# EAGLE board Sturingsschakeling_PCB_v4.0 (EAGLE 9.7.0)
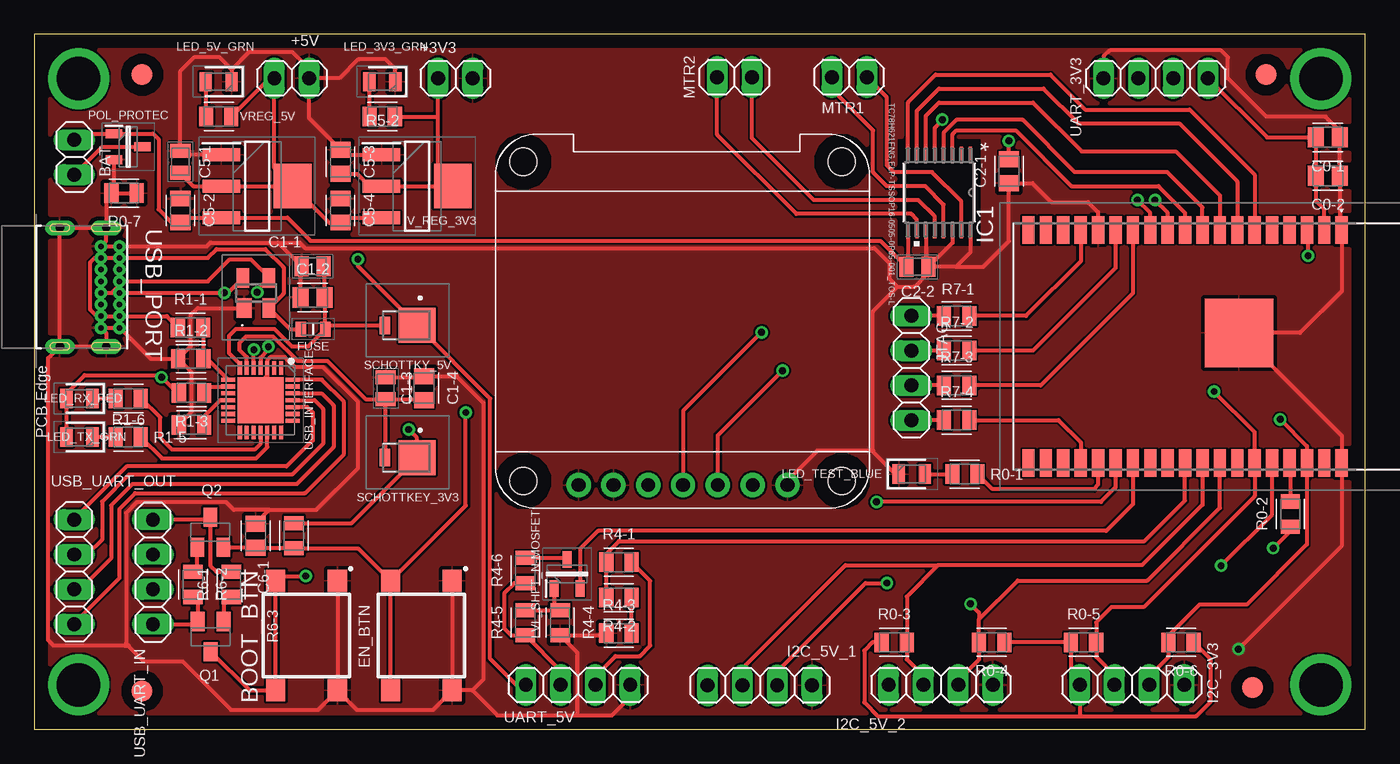
[diagram p0: board, top side]
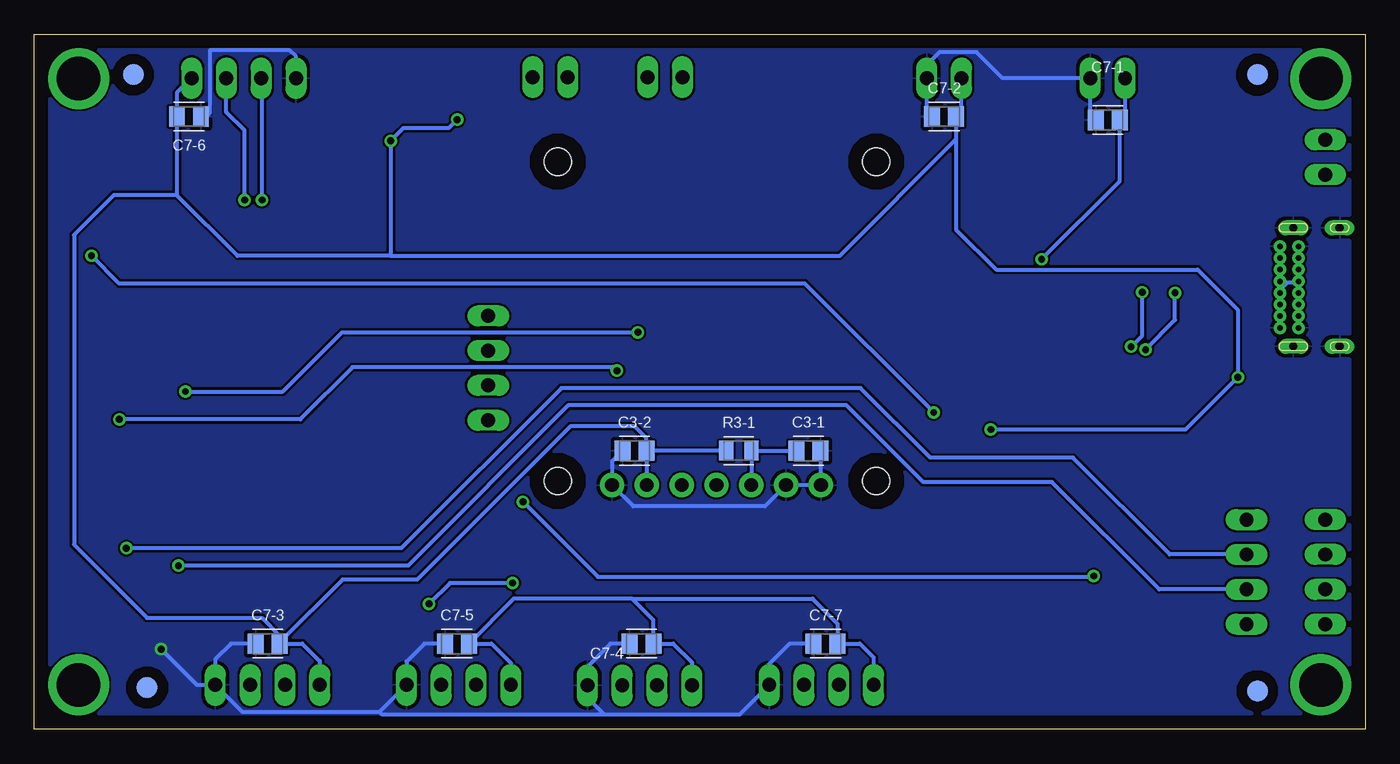
[diagram p1: board, bottom side, seen from below]

Size 97.14 x 50.7 mm. Coordinates in mm from the lower left corner, seen from the top.
Outline: 0,0 97.14,0 97.14,50.7 0,50.7 0,0
Copper layers (1*16): Top 0.035mm / dielectric 1.5mm / Bottom 0.035mm
Design rules "default": minimum track width 6mil, minimum drill 0.35mm, track to track 6mil, track to pad 6mil, pad to pad 6mil, via to via 6mil, smd to smd 6mil, copper to edge 40mil, drill to drill 6mil, minimum pad ring 10mil, minimum via ring 8mil, stop-mask expansion 4mil, vias tented up to drill 0mil, thermal gap 10mil

## Footprints (pad centres in the part's own frame; a part is rotated, then mirrored left to right if it is on the bottom)
1X02 = drill 1.016 long: 1 -1.27,0; 2 1.27,0
B3FS-1000P = smd 1.6 x 1.4: 1 4,-2.25; 2 -4,-2.25; 3 4,2.25; 4 -4,2.25
CAPC2012X110 = smd 1.165 x 1.465: 1 -0.875,0; 2 0.875,0
CAPC2012X145N = smd 1.02 x 1.47: 1 -0.8,0; 2 0.8,0
FID_060_P = smd 1.524 x 1.524 bottom: FIDB 0,0 | smd 1.524 x 1.524: FIDT 0,0
FUSC1608X100N = smd 0.77 x 1.07: 1 -0.9,0; 2 0.9,0
1X04 = drill 1.016 long: 1 -3.81,0; 2 -1.27,0; 3 1.27,0; 4 3.81,0
ESP32WROVER = smd 2 x 0.9: 1 -8.5,8.26; 2 -8.5,6.99; 3 -8.5,5.72; 4 -8.5,4.45; 5 -8.5,3.18; 6 -8.5,1.91; 7 -8.5,0.64; 8 -8.5,-0.63; 9 -8.5,-1.9; 10 -8.5,-3.17; 11 -8.5,-4.44; 12 -8.5,-5.71; 13 -8.5,-6.98; 14 -8.5,-8.25; 15 -8.5,-9.52; 16 -8.5,-10.79; 17 -8.5,-12.06; 18 -8.5,-13.33; 19 -8.5,-14.6; 20 8.5,-14.6; 21 8.5,-13.33; 22 8.5,-12.06; 23 8.5,-10.79; 24 8.5,-9.52; 25 8.5,-8.25; 26 8.5,-6.98; 27 8.5,-5.71; 28 8.5,-4.44; 29 8.5,-3.17; 30 8.5,-1.9; 31 8.5,-0.63; 32 8.5,0.64; 33 8.5,1.91; 34 8.5,3.18; 35 8.5,4.45; 36 8.5,5.72; 37 8.5,6.99; 38 8.5,8.26 | smd 5 x 5: 39 -1,0.76
LEDC2012X80N = smd 0.9 x 1.4: 1 -0.95,0; 2 0.95,0
SOT96P240X110-3N = smd 1.2 x 0.65: 1 -1.05,0.96; 2 -1.05,-0.96; 3 1.05,0
BEAGLEBONEBLACK_MOUNTING_HOLE = drill 3.175 pad 4.445: P$1 0,0
P-TSSOP16-0505-0P65-001_TOS-L = smd 1.006 x 0.23: 1 -2.849,2.275; 2 -2.849,1.625; 3 -2.849,0.975; 4 -2.849,0.325; 5 -2.849,-0.325; 6 -2.849,-0.975; 7 -2.849,-1.625; 8 -2.849,-2.275; 9 2.849,-2.275; 10 2.849,-1.625; 11 2.849,-0.975; 12 2.849,-0.325; 13 2.849,0.325; 14 2.849,0.975; 15 2.849,1.625; 16 2.849,2.275
OLED096_SPI/I2C = drill 1 pad 1.778: CS/GND 22.5,26.87; D0/SCL 12.34,26.87; D1/SDA 14.88,26.87; DC/GND 19.96,26.87; GND 7.26,26.87; RES/RST 17.42,26.87; VCC 9.8,26.87 | hole 2: 3.3,3.27; 26.54,3.27; 26.54,26.57; 3.3,26.57
SOT23-BEC = smd 1 x 1.4: B -0.95,-1.1; C 0,1.1; E 0.95,-1.1
RESC2012X65 = smd 1.031 x 1.42: 1 -0.919,0; 2 0.919,0
SS1P3LM384A = smd 2.67 x 2.54: 1 0,0 | smd 0.762 x 1.27: 2 2.351,0
SP0503BAHTG = smd 1.1 x 1.4: 1 -0.85,-1.1 | smd 0.9 x 1.4: 2 0.95,-1.1; 3 0.95,1.1; 4 -0.95,1.1
QFN50P500X500X80-29N = smd 1 x 0.3: 1 -2.35,1.5; 2 -2.35,1; 3 -2.35,0.5; 4 -2.35,0; 5 -2.35,-0.5; 6 -2.35,-1; 7 -2.35,-1.5; 15 2.35,-1.5; 16 2.35,-1; 17 2.35,-0.5; 18 2.35,0; 19 2.35,0.5; 20 2.35,1; 21 2.35,1.5 | smd 0.3 x 1: 8 -1.5,-2.35; 9 -1,-2.35; 10 -0.5,-2.35; 11 0,-2.35; 12 0.5,-2.35; 13 1,-2.35; 14 1.5,-2.35; 22 1.5,2.35; 23 1,2.35; 24 0.5,2.35; 25 0,2.35; 26 -0.5,2.35; 27 -1,2.35; 28 -1.5,2.35 | smd 3.35 x 3.35: 29 0,0
GCT_USB4085-GF-A_REVA4 = drill 0.4 pad 0.65: A1 -2.975,4.025; A4 -2.125,4.025; A5 -1.275,4.025; A6 -0.425,4.025; A7 0.425,4.025; A8 1.275,4.025; A9 2.125,4.025; A12 2.975,4.025; B1 2.975,2.675; B4 2.125,2.675; B5 1.275,2.675; B6 0.425,2.675; B7 -0.425,2.675; B8 -1.275,2.675; B9 -2.125,2.675; B12 -2.975,2.675 | drill 0.6 pad 1.108 long: P1 -4.325,3.045; P2 4.325,3.045; P3 4.325,-0.335; P4 -4.325,-0.335
SOT230P700X180-4N = smd 2.75 x 0.95: 1 -2.6,2.3; 2 -2.6,0; 3 -2.6,-2.3 | smd 2.75 x 3.25: 4 2.6,0

## Placement (x,y rotation side)
+3V3  PINHD-1X2  [1X02]  30.73,47.5 0 top
+5V  PINHD-1X2  [1X02]  18.8,47.5 0 top
BAT  PINHD-1X2  [1X02]  2.92,41.73 270 top
BOOT_BTN  B3FS-1000P  [B3FS-1000P]  19.87,6.83 90 top
C0-1  22uF  [CAPC2012X110]  94.41,43.18 180 top
C0-2  100nF  [CAPC2012X110]  94.41,40.39 180 top
C1-1  4.7uF_16V  [CAPC2012X145N]  20.32,33.78 0 top
C1-2  100nF  [CAPC2012X110]  20.32,31.5 0 top
C1-3  4.7uF_16V  [CAPC2012X145N]  25.65,24.89 270 top
C1-4  100nF  [CAPC2012X110]  28.45,24.89 270 top
C2-1  1uF  [CAPC2012X110]  71.15,40.72 90 top
C2-2  4.7uF_16V  [CAPC2012X145N]  64.47,33.73 180 top
C3-1  100nF  [CAPC2012X110]  40.64,20.32 0 bottom
C3-2  100nF  [CAPC2012X110]  53.34,20.32 0 bottom
C5-1  4.7uF_16V  [CAPC2012X145N]  10.67,41.4 270 top
C5-2  1uF  [CAPC2012X110]  10.67,37.85 270 top
C5-3  4.7uF  [CAPC2012X110]  22.35,41.4 270 top
C5-4  1uF  [CAPC2012X110]  22.35,37.85 270 top
C6-1  1uF  [CAPC2012X110]  16.15,14.12 270 top
C7-1  1uF  [CAPC2012X110]  18.8,44.45 0 bottom
C7-2  1uF  [CAPC2012X110]  30.73,44.7 0 bottom
C7-3  1uF  [CAPC2012X110]  80.09,6.25 0 bottom
C7-4  1uF  [CAPC2012X110]  52.83,6.25 0 bottom
C7-5  1uF  [CAPC2012X110]  66.29,6.25 0 bottom
C7-6  1uF  [CAPC2012X110]  85.85,44.7 180 bottom
C7-7  1uF  [CAPC2012X110]  39.38,6.25 0 bottom
EN_BTN  B3FS-1000P  [B3FS-1000P]  28.26,6.83 90 top
FD1  FID_60MIL_P  [FID_060_P]  7.87,47.75 0 top
FD2  FID_60MIL_P  [FID_060_P]  89.92,47.75 0 top
FD3  FID_60MIL_P  [FID_060_P]  88.9,3.05 0 top
FD4  FID_60MIL_P  [FID_060_P]  7.87,2.79 0 top
FUSE  MF-FSMF050X-2  [FUSC1608X100N]  20.35,29.18 180 top
I2C_3V3  PINHD-1X4  [1X04]  80.11,3.23 0 top
I2C_5V_1  PINHD-1X4  [1X04]  52.96,3.2 0 top
I2C_5V_2  PINHD-1X4  [1X04]  66.17,3.23 0 top
IC1  ESP32-WROVER  [ESP32WROVER]  87.16,27.92 270 top
JTAG  PINHD-1X4  [1X04]  64.01,26.35 270 top
LED_3V3_GRN  150080RS75000  [LEDC2012X80N]  25.4,47.24 180 top
LED_5V_GRN  150080RS75000  [LEDC2012X80N]  13.46,47.24 180 top
LED_RX_RED  150080RS75000  [LEDC2012X80N]  3.3,24.13 180 top
LED_TEST_BLUE  150080RS75000  [LEDC2012X80N]  64.05,18.62 0 top
LED_TX_GRN  150080RS75000  [LEDC2012X80N]  3.3,21.32 180 top
LVL_SHFT_N-MOSFET  DMG3414U  [SOT96P240X110-3N]  38.89,11.33 90 top
MGT1  BEAGLEBONEBLACK_MOUNTING_HOLE  [BEAGLEBONEBLACK_MOUNTING_HOLE]  3.24,47.47 0 top
MGT2  BEAGLEBONEBLACK_MOUNTING_HOLE  [BEAGLEBONEBLACK_MOUNTING_HOLE]  93.9,3.24 0 top
MGT3  BEAGLEBONEBLACK_MOUNTING_HOLE  [BEAGLEBONEBLACK_MOUNTING_HOLE]  3.24,3.24 0 top
MGT4  BEAGLEBONEBLACK_MOUNTING_HOLE  [BEAGLEBONEBLACK_MOUNTING_HOLE]  93.9,47.47 0 top
MTR1  PINHD-1X2  [1X02]  59.49,47.58 180 top
MTR2  PINHD-1X2  [1X02]  51.1,47.58 180 top
MTR_DRVR  TC78H621FNG,ELP-TSSOP16-0505-0P65-001_TOS-L  [P-TSSOP16-0505-0P65-001_TOS-L]  66.04,39.16 270 top
OLED  OLED096_SPI/I2C  [OLED096_SPI/I2C]  62.23,44.68 180 top
POL_PROTEC  DMG3414U  [SOT96P240X110-3N]  6.86,42.49 0 top
Q1  BC817-16SMD  [SOT23-BEC]  12.88,6.76 180 top
Q2  BC817-16SMD  [SOT23-BEC]  12.85,14.38 0 top
R0-1  1kΩ  [RESC2012X65]  67.92,18.62 0 top
R0-2  499Ω  [RESC2012X65]  91.67,15.7 90 top
R0-3  4k7Ω  [RESC2012X65]  62.76,6.34 0 top
R0-4  4k7Ω  [RESC2012X65]  69.88,6.34 180 top
R0-5  2k4Ω  [RESC2012X65]  76.58,6.34 0 top
R0-6  2k4Ω  [RESC2012X65]  83.69,6.34 180 top
R0-7  1kΩ  [RESC2012X65]  6.55,39.12 180 top
R1-1  22k1Ω  [RESC2012X65]  11.4,29.32 0 top
R1-2  47k5Ω  [RESC2012X65]  11.43,27.03 0 top
R1-3  1kΩ  [RESC2012X65]  11.48,24.54 180 top
R1-4  10kΩ  [RESC2012X65]  11.48,22.2 0 top
R1-5  1kΩ  [RESC2012X65]  6.86,21.32 0 top
R1-6  1kΩ  [RESC2012X65]  6.86,24.13 0 top
R3-1  10kΩ  [RESC2012X65]  45.72,20.32 0 bottom
R4-1  1kΩ  [RESC2012X65]  42.67,12.19 0 top
R4-2  1kΩ  [RESC2012X65]  42.67,9.6 180 top
R4-3  1kΩ  [RESC2012X65]  42.67,7.01 0 top
R4-4  10kΩ  [RESC2012X65]  38.38,7.77 270 top
R4-5  4k7Ω  [RESC2012X65]  35.84,7.77 90 top
R4-6  10kΩ  [RESC2012X65]  35.84,11.58 90 top
R5-1  1kΩ  [RESC2012X65]  13.46,44.7 180 top
R5-2  1kΩ  [RESC2012X65]  25.4,44.7 180 top
R6-1  10kΩ  [RESC2012X65]  14.38,10.57 90 top
R6-2  10kΩ  [RESC2012X65]  11.58,10.57 270 top
R6-3  10kΩ  [RESC2012X65]  18.95,14.12 90 top
R7-1  100Ω  [RESC2012X65]  67.32,30.15 0 top
R7-2  100Ω  [RESC2012X65]  67.32,27.63 0 top
R7-3  100Ω  [RESC2012X65]  67.32,25.09 0 top
R7-4  100Ω  [RESC2012X65]  67.32,22.56 0 top
SCHOTTKEY_3V3  SS1P3L-M3_84A  [SS1P3LM384A]  27.94,19.81 180 top
SCHOTTKY_5V  SS1P3L-M3_84A  [SS1P3LM384A]  27.94,29.46 180 top
TVS_DIODE_ESD_P  SP0503BAHTG  [SP0503BAHTG]  16.18,31.83 0 top
UART_3V3  PINHD-1X4  [1X04]  81.85,47.5 180 top
UART_5V  PINHD-1X4  [1X04]  39.69,3.23 0 top
USB_INTERFACE  CP2102N-A02-GQFN28R  [QFN50P500X500X80-29N]  16.51,24 270 top
USB_PORT  USB4085-GF-A_REVA4  [GCT_USB4085-GF-A_REVA4]  2.21,32.26 270 top
USB_UART_IN  PINHD-1X4  [1X04]  8.66,11.48 90 top
USB_UART_OUT  PINHD-1X4  [1X04]  2.92,11.48 270 top
V_REG_3V3  LDL1117S33R  [SOT230P700X180-4N]  27.94,39.62 0 top
VREG_5V  LDL1117S50R  [SOT230P700X180-4N]  16.26,39.62 0 top

## Library data of the parts
+3V3 +5V BAT I2C_3V3 I2C_5V_1 I2C_5V_2 JTAG MTR1 MTR2 UART_3V3 UART_5V USB_UART_IN USB_UART_OUT = Connector; CATEGORY: CONNECTOR; SUB-CATEGORY: PIN-HEADER
BOOT_BTN EN_BTN = B3FS-1000P; ARROW_PART_NUMBER: B3FS-1000P; ARROW_PRICE-STOCK: https://www.arrow.com/en/products/b3fs-1000p/omron?region=nac; DESCRIPTION: Switch Tact,6x6mm,flat act,gen purp,tape Plunger Tactile Switch, SPST-NO 0.05 A@ 24 V dc 0.5mm; HEIGHT: mm; MANUFACTURER_NAME: Omron Electronics; MANUFACTURER_PART_NUMBER: B3FS-1000P; MOUSER_PART_NUMBER: 653-B3FS-1000P; MOUSER_PRICE-STOCK: https://www.mouser.co.uk/ProductDetail/Omron-Electronics/B3FS-1000P?qs=ImaqFqjHA4k6odVF2%2FXWpQ%3D%3D
C0-1 C0-2 C1-2 C1-4 C2-1 C3-1 C3-2 C5-2-C5-4 C6-1 C7-1-C7-7 = Capacitor; CATEGORY: Capacitor
C1-1 C1-3 C2-2 C5-1 = CC0805ZKY5V7BB475; ARROW_PART_NUMBER: CC0805ZKY5V7BB475; ARROW_PRICE-STOCK: https://www.arrow.com/en/products/cc0805zky5v7bb475/yageo; DESCRIPTION: YAGEO - CC0805ZKY5V7BB475 - SMD Multilayer Ceramic Capacitor, 4.7 F, 16 V, 0805 [2012 Metric], +80%, -20%, Y5V, CC Series; HEIGHT: 1.45mm; MANUFACTURER_NAME: KEMET; MANUFACTURER_PART_NUMBER: CC0805ZKY5V7BB475; MOUSER_PART_NUMBER: 603-CC805ZKY5V7BB475; MOUSER_PRICE-STOCK: https://www.mouser.co.uk/ProductDetail/Yageo/CC0805ZKY5V7BB475?qs=7s%252B3O6pAiyA4wtTM471wUA%3D%3D
FD1-FD4 = Fiducial
FUSE = MF-FSMF050X-2; ARROW_PART_NUMBER: MF-FSMF050X-2; ARROW_PRICE-STOCK: https://www.arrow.com/en/products/mf-fsmf050x-2/bourns?region=nac; DESCRIPTION: 0603 PTC Resettable Fuses, 6V, 500mA Bourns 0.5A Surface Mount Resettable Fuse, 6 V; HEIGHT: 1mm; MANUFACTURER_NAME: Bourns; MANUFACTURER_PART_NUMBER: MF-FSMF050X-2; MOUSER_PART_NUMBER: 652-MFFSMF050X-2; MOUSER_PRICE-STOCK: https://www.mouser.co.uk/ProductDetail/Bourns/MF-FSMF050X-2?qs=3QkGRBNOvbrZekaW8Gqm4A%3D%3D
IC1 = ESP32-WROVER; DESCRIPTION: WiFi Modules (802.11) SMD Module, ESP32-D0WDQ6, 64Mbits PSRAM, 32Mbits SPI flash, PCB Antenna; HEIGHT: 3mm; MANUFACTURER_NAME: Espressif Systems; MANUFACTURER_PART_NUMBER: ESP32-WROVER; MOUSER_PART_NUMBER: 356-ESP32-WROVER
LED_3V3_GRN LED_5V_GRN LED_RX_RED LED_TEST_BLUE LED_TX_GRN = 150080RS75000; DESCRIPTION: LED,Wurth Elektronik,150080RS75000 Wurth Elektronik 150080RS75000, WL-SMCW Series Red LED, 625 nm 2012 (0805) Clear, Rectangle Lens SMD package; HEIGHT: 0.8mm; MANUFACTURER_NAME: Wurth Elektronik; MANUFACTURER_PART_NUMBER: 150080RS75000; MOUSER_PART_NUMBER: 710-150080RS75000; MOUSER_PRICE-STOCK: https://www.mouser.co.uk/ProductDetail/Wurth-Elektronik/150080RS75000?qs=LlUlMxKIyB2jdCo7bnfgew%3D%3D
LVL_SHFT_N-MOSFET POL_PROTEC = DMG3414U; DESCRIPTION: DIODES INC. - DMG3414U - MOSFET, N CH, W DIODE, 20V, 4.2A, SOT23; HEIGHT: 1.1mm; MANUFACTURER_NAME: Diodes Inc.; MANUFACTURER_PART_NUMBER: DMG3414U; MOUSER_PART_NUMBER: N/A; MOUSER_PRICE-STOCK: https://www.mouser.co.uk/ProductDetail/Diodes-Incorporated/DMG3414U?qs=Ledwo0gu0jiKJ4xsXSUnyQ%3D%3D
MGT1-MGT4 = BeagleBone_Black_Wireless
MTR_DRVR = TC78H621FNG-EL; COPYRIGHT: Copyright (C) 2022 Ultra Librarian. All rights reserved.; MANUFACTURER_PART_NUMBER: TC78H621FNG,EL; MFR_NAME: Toshiba Electronic Devices & Storage Co.
OLED = OLED096
Q1 Q2 = transistor-npn
R0-1-R0-7 R1-1-R1-6 R3-1 R4-1-R4-6 R5-1 R5-2 R6-1-R6-3 R7-1-R7-4 = Resistor; CATEGORY: Resistor; SUB-CATEGORY: Fixed
SCHOTTKEY_3V3 SCHOTTKY_5V = SS1P3L-M3_84A; ARROW_PART_NUMBER: SS1P3L-M3/84A; ARROW_PRICE-STOCK: https://www.arrow.com/en/products/ss1p3l-m384a/vishay?region=nac; DESCRIPTION: Schottky Diodes & Rectifiers 30volt 1.0amp Low VF High Current Density Surface Mount Schottky Barrier Rectifiers; HEIGHT: 1.15mm; MANUFACTURER_NAME: Vishay; MANUFACTURER_PART_NUMBER: SS1P3L-M3/84A; MOUSER_PART_NUMBER: 625-SS1P3L-M3/84A; MOUSER_PRICE-STOCK: https://www.mouser.co.uk/ProductDetail/Vishay-General-Semiconductor/SS1P3L-M3-84A?qs=HSPD0Bff7iZtYrbeCvAZDQ%3D%3D
TVS_DIODE_ESD_P = SP0503BAHTG; ARROW_PART_NUMBER: SP0503BAHTG; ARROW_PRICE-STOCK: https://www.arrow.com/en/products/sp0503bahtg/littelfuse?region=europe; DESCRIPTION: ESD Suppressors / TVS Diodes TVS AVAL DIODE SMT; HEIGHT: 1.22mm; MANUFACTURER_NAME: LITTELFUSE; MANUFACTURER_PART_NUMBER: SP0503BAHTG; MOUSER_PART_NUMBER: 576-SP0503BAHTG; MOUSER_PRICE-STOCK: https://www.mouser.co.uk/ProductDetail/Littelfuse/SP0503BAHTG?qs=uD%2FdkN7XIa0NTYXwHdELYA%3D%3D
USB_INTERFACE = CP2102N-A02-GQFN28R; ARROW_PART_NUMBER: CP2102N-A02-GQFN28R; ARROW_PRICE-STOCK: https://www.arrow.com/en/products/cp2102n-a02-gqfn28r/silicon-labs?region=nac; DESCRIPTION: USB Interface IC USB to UART bridge - QFN28; HEIGHT: 0.8mm; MANUFACTURER_NAME: Silicon Labs; MANUFACTURER_PART_NUMBER: CP2102N-A02-GQFN28R; MOUSER_PART_NUMBER: 634-CP2102NA02QFN28R; MOUSER_PRICE-STOCK: https://www.mouser.co.uk/ProductDetail/Silicon-Labs/CP2102N-A02-GQFN28R?qs=u16ybLDytRag4qKvSH3fTw%3D%3D
USB_PORT = USB-C; MANUFACTURER: Global Connector Technology; MAXIMUM_PACKAGE_HEIGHT: 3.46mm; PARTREV: A4; STANDARD: Manufacturer Recommendations
V_REG_3V3 = LDL1117S33R; ARROW_PART_NUMBER: LDL1117S33R; ARROW_PRICE-STOCK: https://www.arrow.com/en/products/ldl1117s33r/stmicroelectronics?region=nac; DESCRIPTION: STMICROELECTRONICS - LDL1117S33R - LDO, FIXED, 3.3V, 1.2A, SOT-223-3; HEIGHT: 1.8mm; MANUFACTURER_NAME: STMicroelectronics; MANUFACTURER_PART_NUMBER: LDL1117S33R; MOUSER_PART_NUMBER: 511-LDL1117S33R; MOUSER_PRICE-STOCK: https://www.mouser.co.uk/ProductDetail/STMicroelectronics/LDL1117S33R?qs=AQlKX63v8Rt9Bf6AWSrbFg%3D%3D
VREG_5V = LDL1117S50R; ARROW_PART_NUMBER: LDL1117S50R; ARROW_PRICE-STOCK: https://www.arrow.com/en/products/ldl1117s50r/stmicroelectronics?region=nac; DESCRIPTION: STMICROELECTRONICS - LDL1117S50R - LDO, FIXED, 5V, 1.2A, SOT-223-3; HEIGHT: 1.8mm; MANUFACTURER_NAME: STMicroelectronics; MANUFACTURER_PART_NUMBER: LDL1117S50R; MOUSER_PART_NUMBER: 511-LDL1117S50R; MOUSER_PRICE-STOCK: https://www.mouser.co.uk/ProductDetail/STMicroelectronics/LDL1117S50R?qs=AQlKX63v8RsuN9BQFiVf%2Fg%3D%3D

## Nets
3V3_USB: C1-3.2 C1-4.2 SCHOTTKEY_3V3.2 USB_INTERFACE.6
5V_OUT: LVL_SHFT_N-MOSFET.3 R4-6.2
5V_USB: C1-1.2 C1-2.2 FUSE.1 SCHOTTKY_5V.2 USB_INTERFACE.7
+3.3V: +3V3.1 C0-1.2 C0-2.2 C2-1.2 C3-2.2 C5-3.2 C7-2.2 C7-3.2 C7-6.2 I2C_3V3.1 IC1.2 LED_RX_RED.2 LED_TX_GRN.2 MTR_DRVR.5 OLED.VCC R0-3.1 R0-4.1 R0-5.1 R0-6.1 R1-3.2 R3-1.1 R5-2.1 R6-3.2 SCHOTTKEY_3V3.1 UART_3V3.1 V_REG_3V3.2 V_REG_3V3.4
+5V: +5V.1 C5-1.2 C5-4.2 C7-1.2 C7-4.2 C7-5.2 C7-7.2 I2C_5V_1.1 I2C_5V_2.1 R5-1.1 SCHOTTKY_5V.1 UART_5V.1 V_REG_3V3.3 VREG_5V.2 VREG_5V.4
BOOT: BOOT_BTN.3 BOOT_BTN.4 IC1.25 Q1.C
D+: TVS_DIODE_ESD_P.3 USB_INTERFACE.4 USB_PORT.A6 USB_PORT.B6
D-: TVS_DIODE_ESD_P.4 USB_INTERFACE.5 USB_PORT.A7 USB_PORT.B7
DTR_IN: Q1.E R6-2.2 USB_UART_IN.1
DTR_OUT: USB_INTERFACE.28 USB_UART_OUT.4
EN: C6-1.2 EN_BTN.3 EN_BTN.4 IC1.3 Q2.E R6-3.1
GND: +3V3.2 +5V.2 BOOT_BTN.1 BOOT_BTN.2 C0-1.1 C0-2.1 C1-1.1 C1-2.1 C1-3.1 C1-4.1 C2-1.1 C2-2.1 C3-1.2 C3-2.1 C5-1.1 C5-2.1 C5-3.1 C5-4.1 C6-1.1 C7-1.1 C7-2.1 C7-3.1 C7-4.1 C7-5.1 C7-6.1 C7-7.1 EN_BTN.1 EN_BTN.2 I2C_3V3.4 I2C_5V_1.4 I2C_5V_2.4 IC1.1 IC1.15 IC1.38 IC1.39 LED_3V3_GRN.1 LED_5V_GRN.1 LED_TEST_BLUE.1 MTR_DRVR.11 MTR_DRVR.14 MTR_DRVR.16 OLED.CS/GND OLED.DC/GND OLED.GND POL_PROTEC.2 R0-7.1 R0-7.2 R1-2.1 R1-4.1 R4-3.1 R4-4.2 TVS_DIODE_ESD_P.1 UART_3V3.4 UART_5V.4 USB_INTERFACE.3 USB_INTERFACE.29 USB_PORT.A1 USB_PORT.A12 USB_PORT.B1 USB_PORT.B12 USB_PORT.P1 USB_PORT.P2 USB_PORT.P3 USB_PORT.P4 V_REG_3V3.1 VREG_5V.1
GND_BAT: BAT.2 POL_PROTEC.3
LED_RX: R1-6.2 USB_INTERFACE.18
LED_TEST: IC1.24 R0-1.2
LED_TX: R1-5.2 USB_INTERFACE.19
MTCK: IC1.16 R7-1.2
MTDI: IC1.14 R7-2.2
MTDO: IC1.23 R7-4.2
MTMS: IC1.13 R7-3.2
MTR1_EN: IC1.9 MTR_DRVR.4
MTR1_OUT1: MTR1.1 MTR_DRVR.15
MTR1_OUT2: MTR1.2 MTR_DRVR.13
MTR1_PHA: IC1.10 MTR_DRVR.3
MTR2_EN: IC1.6 MTR_DRVR.8
MTR2_OUT1: MTR2.1 MTR_DRVR.12
MTR2_OUT2: MTR2.2 MTR_DRVR.10
MTR2_PHA: IC1.7 MTR_DRVR.7
MTR_STBY: IC1.8 MTR_DRVR.6
N$6: JTAG.1 R7-1.1
N$7: LED_3V3_GRN.2 R5-2.2
N$8: LED_5V_GRN.2 R5-1.2
N$10: LED_TEST_BLUE.2 R0-1.1
N$11: JTAG.2 R7-2.1
N$14: JTAG.3 R7-3.1
N$15: JTAG.4 R7-4.1
N$18: Q1.B R6-1.1
N$19: Q2.B R6-2.1
N$34: LVL_SHFT_N-MOSFET.1 R4-4.1 R4-5.2
N$35: R4-2.1 R4-3.2
N$38: IC1.35 R0-2.2
N$40: LED_TX_GRN.1 R1-5.1
N$41: LED_RX_RED.1 R1-6.1
RES: C3-1.1 OLED.RES/RST R3-1.2
RSTB: R1-3.1 USB_INTERFACE.9
RTS_IN: Q2.C R6-1.2 USB_UART_IN.4
RTS_OUT: USB_INTERFACE.24 USB_UART_OUT.1
RX_3V3: IC1.11 UART_3V3.2
RX_5V_A: IC1.26 LVL_SHFT_N-MOSFET.2
RX_5V_B: R4-1.2 UART_5V.3
RX_USB: USB_INTERFACE.26 USB_UART_OUT.3
RX_USB_IN: IC1.34 USB_UART_IN.2
SCL_3V3: I2C_3V3.3 IC1.36 OLED.D0/SCL R0-6.2
SCL_5V: I2C_5V_1.3 I2C_5V_2.3 IC1.31 R0-4.2
SDA_3V3: I2C_3V3.2 IC1.33 OLED.D1/SDA R0-5.2
SDA_5V: I2C_5V_1.2 I2C_5V_2.2 IC1.30 R0-3.2
SUSPENDB: R1-4.2 USB_INTERFACE.11
TX_3V3: IC1.12 UART_3V3.3
TX_5V_A: IC1.29 R4-1.1 R4-2.2
TX_5V_B: R4-5.1 R4-6.1 UART_5V.2
TX_USB: USB_INTERFACE.25 USB_UART_OUT.2
TX_USB_IN: R0-2.1 USB_UART_IN.3
V_BAT: BAT.1 C2-2.2 C5-2.2 MTR_DRVR.9 POL_PROTEC.1 VREG_5V.3
VBUS_INT: R1-1.2 R1-2.2 USB_INTERFACE.8
VBUS_USB: FUSE.2 R1-1.1 TVS_DIODE_ESD_P.2 USB_PORT.A4 USB_PORT.A9 USB_PORT.B4 USB_PORT.B9

## Tracks (layer width: path | path; a pad name or v marks a point on that pad's centre or on a via)
3V3_USB
  Top 0.3: SCHOTTKEY_3V3.2 25.65,19.88 C1-3.2 | C1-3.2 28.37,24.09 C1-4.2 | USB_INTERFACE.6 15.51,27.14 14.99,27.67 14.99,28.19 15.46,28.67 17.41,28.67 19.21,26.87 21.39,26.87 24.17,24.09 C1-3.2
5V_OUT
  Top 0.3: R4-6.2 38.76,12.5 LVL_SHFT_N-MOSFET.3
5V_USB
  Top 0.3: USB_INTERFACE.7 15.01,26.65 14.22,27.43 14.22,28.7 14.73,29.21 17.53,29.21 18.8,27.94 20,27.94 FUSE.1 | FUSE.1 21.52,29.46 SCHOTTKY_5V.2 | FUSE.1 21.25,31.45 C1-2.2 21.2,33.71 C1-1.2
+3.3V  (via drill 0.5)
  Top 0.3: MTR_DRVR.5 65.72,43.87 66.27,44.42 v66.27,44.48 | C2-1.2 71.12,41.62 v71.12,42.93 | IC1.2 94.15,37.93 93.54,38.54 C0-2.2 C0-1.2 89.98,43.18 UART_3V3.1 | R0-4.1 R0-5.1 75.66,3.87 I2C_3V3.1 76.3,0.96 | R0-3.1 61.18,6.34 60.58,5.74 60.58,1.96 61.57,0.96 76.3,0.96 | 76.3,0.96 84.81,0.96 85.85,2.01 85.85,5.1 R0-6.1 | C5-3.2 23.55,40.53 24.45,39.62 V_REG_3V3.2 V_REG_3V3.4 29.46,40.7 29.46,44.7 | 29.46,44.7 +3V3.1 | R5-2.1 29.46,44.7 | R1-3.2 10.43,24.54 v9.3,25.68 9.14,25.83 3.68,25.83 2.35,24.5 LED_RX_RED.2 LED_TX_GRN.2 | R6-3.2 23.17,15.04 SCHOTTKEY_3V3.1 27.94,21.26 v27.33,21.87
  Bottom 0.3: UART_3V3.1 86.73,46.43 C7-6.2 86.73,38.98 | C3-2.2 52.47,17.85 OLED.VCC | R3-1.1 C3-2.2 | 79.22,6.35 79.22,6.83 80.52,8.13 88.9,8.13 94.23,13.46 94.23,36.07 91.33,38.98 86.73,38.98 | I2C_3V3.1 76.3,4.98 77.57,6.25 C7-3.2 79.22,6.35 | C7-2.2 29.46,45.1 +3V3.1 | C7-2.2 29.86,36.46 26.94,33.53 12.23,33.53 9.32,30.62 9.32,25.7 v9.3,25.68 13.11,21.87 v27.33,21.87 | C7-2.2 29.86,43.04 38.35,34.54 71.12,34.54 | C3-2.2 52.47,21.22 53.34,22.1 58.01,22.1 69.18,10.92 74.65,10.92 79.22,6.35 | 71.12,34.54 82.3,34.54 86.73,38.98 | 71.12,34.54 v71.12,42.93 70.18,43.87 66.88,43.87 v66.27,44.48
+5V  (via drill 0.5)
  Top 0.3: C5-1.2 10.67,40.56 11.61,39.62 VREG_5V.2 VREG_5V.4 | VREG_5V.4 21.51,36.97 C5-4.2 22.7,37.32 V_REG_3V3.3 | R5-1.1 17.18,47.5 +5V.1 17.53,40.95 VREG_5V.4 | UART_5V.1 35.17,3.23 33.27,5.13 33.27,24.13 SCHOTTKY_5V.1 23.62,33.78 v23.62,34.29
  Bottom 0.3: I2C_5V_2.1 62.36,4.83 63.78,6.25 C7-5.2 62.14,9.53 53.52,9.53 | I2C_5V_1.1 49.15,4.87 50.52,6.25 C7-4.2 51.96,7.96 53.52,9.53 | 53.52,9.53 40.34,9.53 38.5,7.69 C7-7.2 36.88,6.25 35.88,5.25 UART_5V.1 | +5V.1 17.53,44.84 C7-1.2 17.92,39.99 v23.62,34.29
BOOT  (via drill 0.5)
  Top 0.3: IC1.25 78.91,17.64 77.85,16.59 v61.47,16.59 | Q1.C 15.7,2.83 BOOT_BTN.4 BOOT_BTN.3 17.97,11.18 v19.81,11.18
  Bottom 0.3: v61.47,16.59 56.01,11.12 19.86,11.12 v19.81,11.18
D+  (via drill 0.5)
  Top 0.3: USB_PORT.B6 5.67,31.83 6.23,32.4 USB_PORT.A6 12.67,32.68 14.27,34.28 15.8,34.28 17.13,32.96 TVS_DIODE_ESD_P.3 16.28,32.08 v16.28,31.88 | USB_INTERFACE.4 16.51,27.11 17.09,27.68 v17.09,27.91
  Bottom 0.3: v17.09,27.91 16.28,28.72 v16.28,31.88
D-  (via drill 0.5)
  Top 0.3: USB_PORT.A7 v13.88,31.83 14.14,31.83 TVS_DIODE_ESD_P.4 | USB_INTERFACE.5 16.01,27.67 v16.03,27.69
  Bottom 0.3: USB_PORT.B7 4.97,32.59 5.7,32.59 6.23,32.06 USB_PORT.A7 | v13.88,31.83 13.88,29.86 16.03,27.71 v16.03,27.69
DTR_IN
  Top 0.3: USB_UART_IN.1 11.74,7.67 Q1.E 11.93,9.3 R6-2.2
DTR_OUT
  Top 0.3: USB_UART_OUT.4 2.92,7.75 6.22,11.05 6.22,16.08 7.37,17.22 19.76,17.22 22.61,20.07 22.61,23.88 20.98,25.5 USB_INTERFACE.28
EN  (via drill 0.5)
  Top 0.3: IC1.3 92.96,36.34 v92.96,34.54 | EN_BTN.4 EN_BTN.3 | EN_BTN.3 23.64,13.2 R6-3.1 18.9,13.25 C6-1.2 13.83,13.25 Q2.E | EN_BTN.3 31.5,16.32 v31.5,23.11
  Bottom 0.3: v31.5,23.11 40.89,32.51 90.93,32.51 v92.96,34.54
GND  (via drill 0.5)
  Top 0.3: MTR_DRVR.11 65.06,33.93 C2-2.1 | MTR_DRVR.14 67.02,35.48 C2-2.1 | MTR_DRVR.16 68.31,34.79 67.26,33.73 | 67.26,33.73 C2-2.1 | C0-1.1 C0-2.1 95.29,36.55 IC1.1 95.42,31.97 92.37,28.92 IC1.39 95.42,21.42 IC1.38 95.42,13.38 v87.88,5.84 | IC1.15 77.64,37.73 76.91,38.46 74.24,38.46 72.86,39.84 C2-1.1 71.14,35.61 69.27,33.73 67.26,33.73 | LED_TEST_BLUE.1 62.84,18.62 61.14,20.32 | 61.14,20.32 61.21,20.32 61.21,30.5 62.99,32.28 | 61.14,20.32 57.15,20.32 54.97,18.14 OLED.GND | 41.5,7.01 R4-3.1 41.59,6.85 R4-4.2 39.62,5.61 39.62,1.02 | 31.98,2.83 EN_BTN.2 | 30.82,10.83 EN_BTN.1 EN_BTN.2 | BOOT_BTN.1 BOOT_BTN.2 | USB_PORT.P3 USB_PORT.P2 5.25,28.91 USB_PORT.B1 USB_PORT.A12 8.48,27.03 R1-2.1 | USB_PORT.P1 USB_PORT.P4 USB_PORT.P3 | USB_PORT.P1 5.25,35.6 USB_PORT.B12 USB_PORT.A1 12.58,35.23 12.85,35.51 17.79,35.51 | 17.79,35.51 C1-1.1 19.45,33.71 C1-2.1 | R0-7.2 R0-7.1 | R0-7.2 5.25,38.73 USB_PORT.P1 | POL_PROTEC.2 5.81,39.29 R0-7.2 | C5-2.1 10.71,38.72 11.02,38.41 | V_REG_3V3.1 22.7,41.92 C5-3.1 20.07,44.56 +5V.2 | VREG_5V.1 10.95,41.92 C5-1.1 10.67,48.01 11.71,49.05 13.49,49.05 14.4,48.13 | 14.4,48.13 14.41,48.12 LED_5V_GRN.1 | LED_3V3_GRN.1 26.35,48.17 25.65,48.87 23.65,48.87 22.28,47.5 +5V.2 | 17.79,35.51 19.38,35.51 19.79,35.1 61.32,35.1 62.41,34.01 62.41,32.87 62.99,32.28 | 62.99,32.28 64.26,32.28 65.27,33.29 C2-2.1 | +5V.2 20.07,48.18 18.87,49.38 15.65,49.38 14.4,48.13 | C1-3.1 28.37,25.69 C1-4.1 30.82,25.77 32.77,23.82 32.77,3.61 31.98,2.83 | R1-2.1 11.43,27.95 11.43,30.23 11.93,30.73 TVS_DIODE_ESD_P.1 | 17.16,16 20.57,16 23.62,19.05 23.62,23.88 21.08,26.42 19.02,26.42 18.29,27.16 17.23,27.16 17.01,26.93 USB_INTERFACE.3
  Top 0.3: 17.16,16 C6-1.1 | 31.98,2.83 33.8,1.02 39.62,1.02 | 39.62,1.02 42.16,1.02 43.5,2.35 UART_5V.4 | R1-4.1 10.56,22.25 11.48,23.16 11.48,26.06 R1-2.1 | BOOT_BTN.2 23.54,1.42 29.09,1.42 EN_BTN.2 | 17.16,16 14.55,16 13.99,16.56 7.49,16.56 6.71,15.77 6.71,6.25 | 6.71,6.25 6.86,6.1 | 6.86,6.1 8,4.95 10.82,4.95 14.35,1.42 20.71,1.42 BOOT_BTN.2 | C0-1.1 95.29,43.73 | UART_3V3.4 78.04,49.09 78.49,49.53 86.61,49.53 87.12,49.02 87.12,47.5 89.92,44.7 94.23,44.7 95.29,43.65 C0-1.1 | USB_INTERFACE.3 17.01,24.5 USB_INTERFACE.29 16.51,25.27 17.01,25.77 USB_INTERFACE.3 | 6.71,6.25 6.55,6.1 | 6.55,6.1 1.42,6.1 1.02,6.5 1.02,27.08 USB_PORT.P3 | 6.55,6.1 6.86,6.1
  Bottom 0.3: UART_3V3.4 78.04,49.09 78.49,49.53 84.33,49.53 84.33,44.96 84.58,44.7 C7-6.1 | C3-2.1 54.97,19.57 OLED.GND 53.41,16.26 43.83,16.26 OLED.DC/GND OLED.CS/GND 39.77,17.85 C3-1.2 | C7-5.1 68.66,6.25 69.98,4.93 I2C_5V_2.4 71.94,1.27 | C7-3.1 82.78,6.25 83.92,5.11 I2C_3V3.4 | C7-4.1 55.09,6.25 56.77,4.58 I2C_5V_1.4 56.77,2.31 55.52,1.07 | C7-7.1 42.01,6.25 43.53,4.73 43.53,3.2 UART_5V.4 45.66,1.07 55.52,1.07 | C7-1.1 20.07,44.84 +5V.2 26.47,47.5 28.37,49.4 31.06,49.4 32,48.46 +3V3.2 32,45.1 C7-2.1 | I2C_3V3.4 81.96,1.27 71.94,1.27 | 55.52,1.07 71.73,1.07 71.94,1.27 | v87.88,5.84 85.27,3.23 I2C_3V3.4
  pour Top: -7.37,52.07 -7.37,-1.02 107.19,-1.02 107.19,52.07
  pour Bottom: -7.37,52.07 -7.37,-1.02 106.93,-1.02 106.93,52.07
GND_BAT
  Top 0.3: BAT.2 4.95,42.49 POL_PROTEC.3
LED_RX
  Top 0.3: USB_INTERFACE.18 16.51,20.83 16.08,20.4 10.06,20.4 9.2,21.26 9.2,22.76 7.82,24.13 R1-6.2
LED_TEST
  Top 0.3: IC1.24 77.64,17.85 77.32,17.53 69.93,17.53 R0-1.2
LED_TX
  Top 0.3: R1-5.2 9.33,19.76 16.18,19.76 17.01,20.59 USB_INTERFACE.19
MTCK
  Top 0.3: IC1.16 76.37,34.13 72.39,30.15 R7-1.2
MTDI
  Top 0.3: IC1.14 78.91,33.65 72.89,27.63 R7-2.2
MTDO
  Top 0.3: R7-4.2 74.75,22.55 76.37,20.94 IC1.23
MTMS
  Top 0.3: IC1.13 80.18,31.82 73.45,25.09 R7-3.2
MTR1_EN
  Top 0.3: MTR_DRVR.4 66.36,43.51 67.31,44.45 72.14,44.45 75.95,40.64 82.68,40.64 85.25,38.07 85.25,36.43 IC1.9
MTR1_OUT1
  Top 0.3: MTR_DRVR.15 67.67,38.51 65.53,40.64 62.74,40.64 62.23,41.15 62.23,46.1 MTR1.1
MTR1_OUT2
  Top 0.3: MTR_DRVR.13 66.36,38.28 65.02,39.62 62.23,39.62 61.21,40.64 61.21,43.69 58.22,46.69 MTR1.2
MTR1_PHA
  Top 0.3: MTR_DRVR.3 67.02,43.39 67.31,43.69 71.63,43.69 75.69,39.62 82.04,39.62 83.99,37.68 IC1.10
MTR2_EN
  Top 0.3: MTR_DRVR.8 63.77,45.73 65.79,47.75 74.17,47.75 76.71,45.21 84.33,45.21 89.07,40.47 IC1.6
MTR2_OUT1
  Top 0.3: MTR_DRVR.12 65.72,37.41 64.52,38.61 56.9,38.61 52.38,43.13 MTR2.1
MTR2_OUT2
  Top 0.3: MTR_DRVR.10 64.42,37.19 64.01,37.59 55.63,37.59 49.84,43.38 MTR2.2
MTR2_PHA
  Top 0.3: MTR_DRVR.7 64.42,45.11 66.04,46.74 73.66,46.74 76.2,44.2 83.57,44.2 87.8,39.96 IC1.7
MTR_STBY
  Top 0.3: MTR_DRVR.6 65.06,44.74 66.04,45.72 72.9,45.72 76.45,42.16 83.31,42.16 86.53,38.95 IC1.8
N$6
  Top 0.3: R7-1.1 64.02,30.15 JTAG.1
N$7
  Top 0.3: R5-2.2 24.48,47.21 LED_3V3_GRN.2
N$8
  Top 0.3: LED_5V_GRN.2 12.51,44.73 R5-1.2
N$10
  Top 0.3: LED_TEST_BLUE.2 R0-1.1
N$11
  Top 0.3: R7-2.1 JTAG.2
N$14
  Top 0.3: R7-3.1 64.02,25.09 JTAG.3
N$15
  Top 0.3: R7-4.1 64.02,22.55 JTAG.4
N$18
  Top 0.3: R6-1.1 13.83,9.1 Q1.B
N$19
  Top 0.3: R6-2.1 11.9,11.81 Q2.B
N$34
  Top 0.3: LVL_SHFT_N-MOSFET.1 37.93,9.14 R4-4.1 R4-5.2
N$35
  Top 0.3: R4-3.2 R4-2.1
N$38
  Top 0.3: IC1.35 91.67,19.36 R0-2.2
N$40
  Top 0.3: R1-5.1 LED_TX_GRN.1
N$41
  Top 0.3: R1-6.1 LED_RX_RED.1
RES
  Bottom 0.3: C3-1.1 R3-1.2 44.8,17.82 OLED.RES/RST
RSTB
  Top 0.3: R1-3.1 12.86,25 USB_INTERFACE.9
RTS_IN
  Top 0.3: R6-1.2 13.3,11.49 12.85,11.94 Q2.C 12.67,15.29 USB_UART_IN.4
RTS_OUT
  Top 0.3: USB_INTERFACE.24 19.93,23.5 20.32,23.11 20.32,21.08 18.41,19.18 6.73,19.18 2.92,15.37 USB_UART_OUT.1
RX_3V3  (via drill 0.5)
  Top 0.3: IC1.11 82.72,37.68 v81.79,38.61
  Bottom 0.3: v81.79,38.61 81.79,43.69 83.12,45.02 UART_3V3.2
RX_5V_A
  Top 0.3: IC1.26 80.18,16.43 78.23,14.48 41.15,14.48 39.85,13.18 LVL_SHFT_N-MOSFET.2
RX_5V_B
  Top 0.3: UART_5V.3 40.96,3.87 42.42,5.33 44.2,5.33 44.96,6.1 44.96,10.82 R4-1.2
RX_USB
  Top 0.3: USB_INTERFACE.26 20.96,24.5 21.84,23.62 21.84,20.57 19.15,17.88 7.16,17.88 5.61,16.33 5.61,12.47 3.35,10.21 USB_UART_OUT.3
RX_USB_IN  (via drill 0.5)
  Top 0.3: v86.61,11.94 90.34,15.66 IC1.34
  Bottom 0.3: USB_UART_IN.2 15.04,10.21 22.86,18.03 32.26,18.03 37.85,23.62 58.17,23.62 69.85,11.94 v86.61,11.94
SCL_3V3  (via drill 0.5)
  Top 0.3: I2C_3V3.3 81.38,3.86 82.77,5.25 R0-6.2 82.77,6.83 85.04,9.09 88.49,9.09 92.88,13.48 IC1.36 92.88,20.66 v90.93,22.61 | OLED.D0/SCL 49.89,21.44 v54.61,26.16
  Bottom 0.3: v54.61,26.16 54.86,26.42 73.91,26.42 77.72,22.61 v90.93,22.61
SCL_5V  (via drill 0.5)
  Top 0.3: I2C_5V_2.3 67.44,3.56 68.96,5.08 R0-4.2 68.96,8.02 | 68.96,8.02 71.78,10.85 81.23,10.85 86.53,16.15 IC1.31 | I2C_5V_1.3 54.23,4.22 60.68,10.67 v62.23,10.67 | v68.33,9.14 68.96,8.51 68.96,8.02
  Bottom 0.3: v62.23,10.67 66.8,10.67 v68.33,9.14
SDA_3V3  (via drill 0.5)
  Top 0.3: I2C_3V3.2 78.84,3.94 77.5,5.28 R0-5.2 77.5,7.8 78.61,8.91 80.97,8.91 89.07,17.01 IC1.33 89.07,21.67 v86.11,24.64 | v53.09,28.96 47.35,23.22 OLED.D1/SDA
  Bottom 0.3: v86.11,24.64 78.99,24.64 74.68,28.96 v53.09,28.96
SDA_5V
  Top 0.3: I2C_5V_2.2 64.9,3.89 63.68,5.1 R0-3.2 63.68,9.68 65.97,11.97 | IC1.30 85.26,16.38 80.85,11.97 65.97,11.97 | I2C_5V_1.2 51.69,4.44 59.21,11.97 65.97,11.97
SUSPENDB
  Top 0.3: R1-4.2 12.4,22.82 13.58,24 USB_INTERFACE.11
TX_3V3  (via drill 0.5)
  Top 0.3: IC1.12 81.45,37.68 v80.52,38.61
  Bottom 0.3: v80.52,38.61 80.52,47.43 UART_3V3.3
TX_5V_A
  Top 0.3: R4-2.2 R4-1.1 41.75,12.8 42.67,13.72 81.03,13.72 83.99,16.68 IC1.29
TX_5V_B
  Top 0.3: UART_5V.2 38.42,4.28 R4-5.1 34.8,6.85 34.29,7.37 34.29,9.91 35.05,10.66 R4-6.1
TX_USB
  Top 0.3: USB_INTERFACE.25 20.45,24 21.08,23.37 21.08,20.83 18.82,18.57 6.91,18.57 4.95,16.61 4.95,13.84 3.86,12.75 USB_UART_OUT.2
TX_USB_IN  (via drill 0.5)
  Top 0.3: v90.42,13.21 91.67,14.45 R0-2.1
  Bottom 0.3: USB_UART_IN.3 14.28,12.75 21.34,19.81 31.75,19.81 36.83,24.89 58.67,24.89 70.36,13.21 v90.42,13.21
V_BAT
  Top 0.3: MTR_DRVR.9 63.77,33.83 C2-2.2 61.76,35.64 20.17,35.64 18.48,37.32 VREG_5V.3 11.02,37.32 C5-2.2 10.03,36.97 9.07,37.94 9.07,43.05 8.67,43.45 POL_PROTEC.1 3.37,43.45 BAT.1
VBUS_INT
  Top 0.3: USB_INTERFACE.8 12.63,27.03 R1-2.2 12.35,29.29 R1-1.2
VBUS_USB
  Top 0.3: R1-1.1 9.67,30.13 USB_PORT.A9 USB_PORT.B4 4.56,30.13 4.09,30.61 4.09,34.07 4.41,34.38 USB_PORT.B9 USB_PORT.A4 12.67,34.38 13.31,35.03 16.87,35.03 18.19,33.71 18.19,31.78 TVS_DIODE_ESD_P.2 18.67,29.18 FUSE.2